# EAGLE board codeshield_complete (EAGLE 6.2)
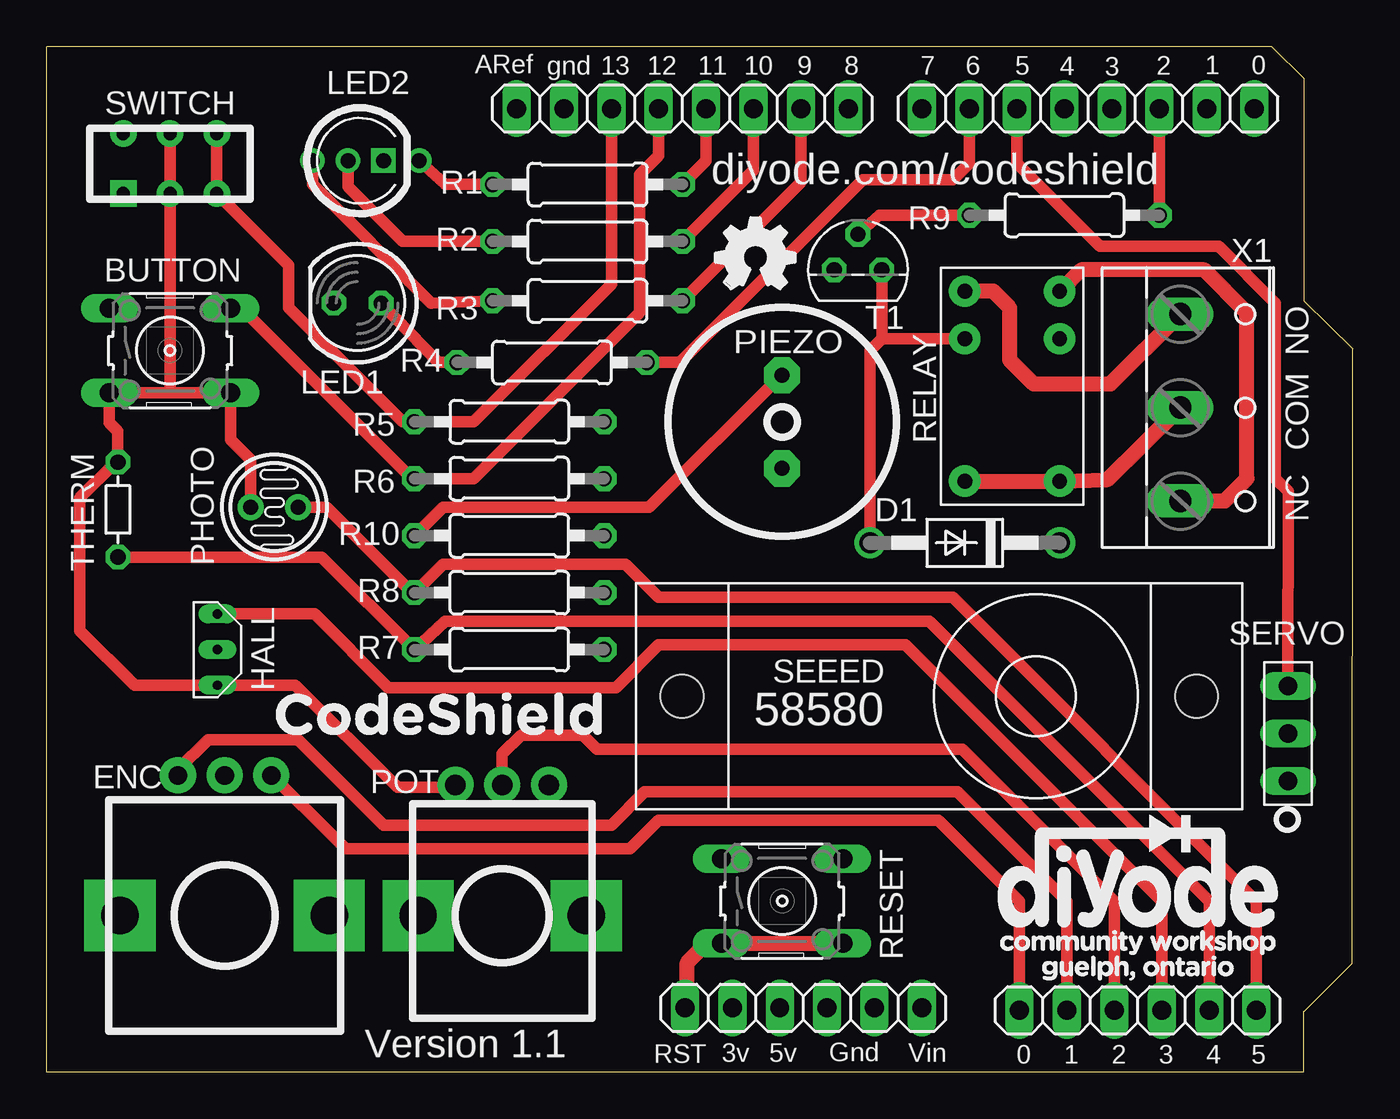
[diagram p0: board, top side]
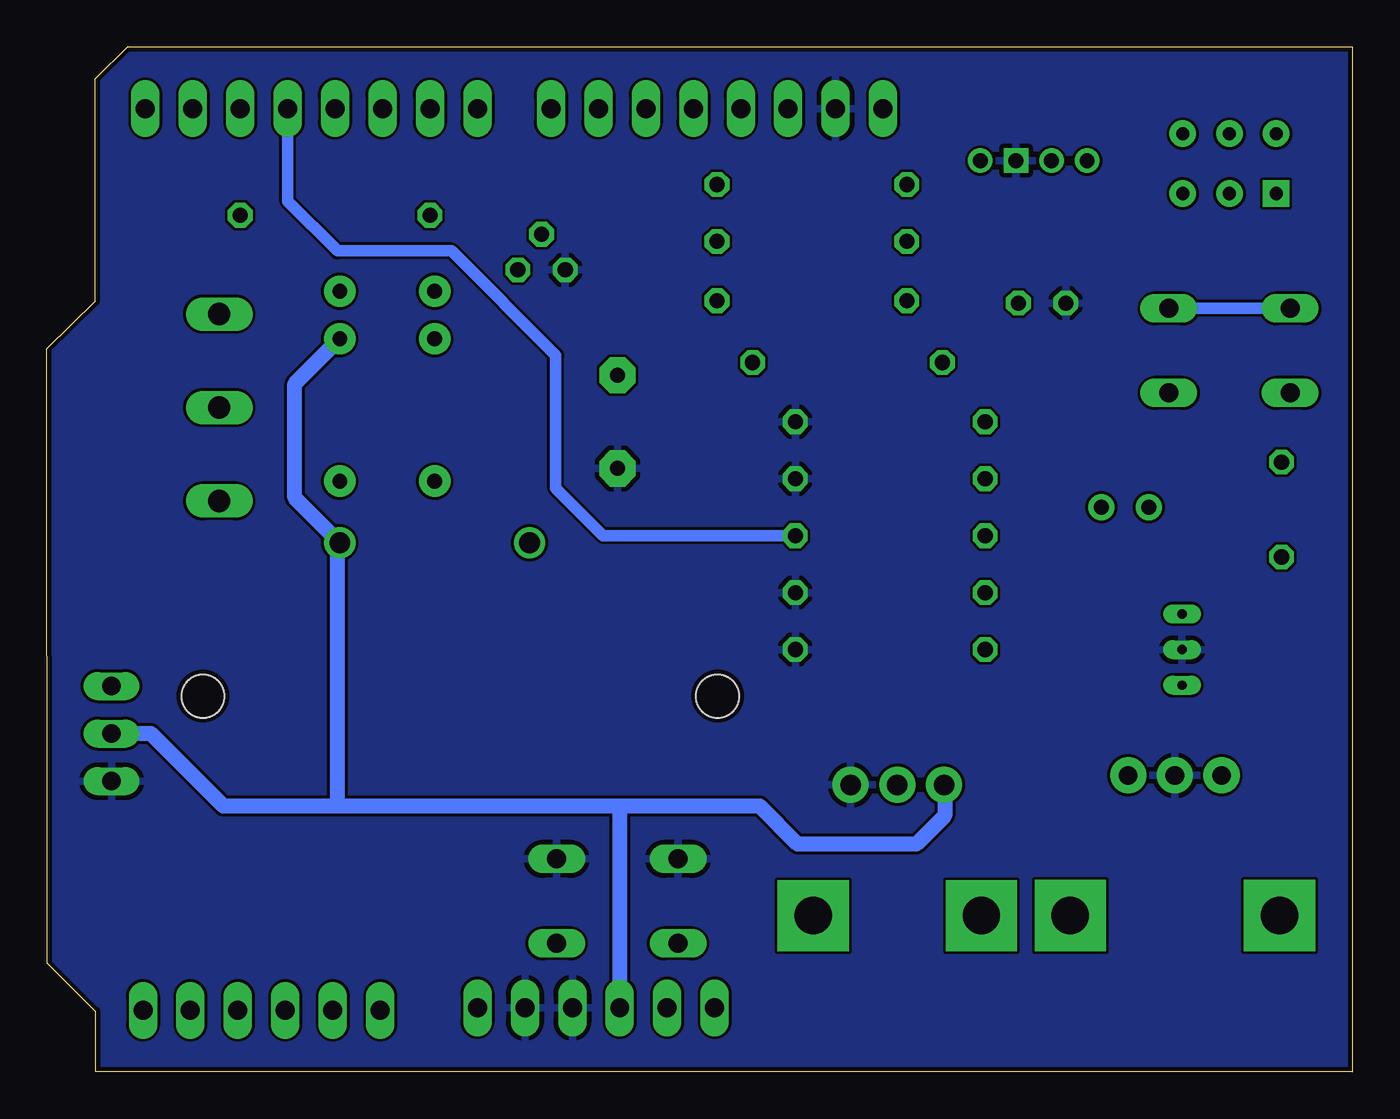
[diagram p1: board, bottom side, seen from below]

Size 69.92 x 54.87 mm. Coordinates in mm from the lower left corner, seen from the top.
Outline: 69.9,5.81 69.9,5.82
Outline: 69.9,5.82 69.92,38.71 67.32,41.25 67.32,53.16 65.59,54.87 0.01,54.87 0,0
Outline: 67.32,3.26 69.9,5.82
Outline: 0,0.01 67.31,0.01 67.31,3.26
Copper layers (1*16): Top 0.035mm / dielectric 1.5mm / Bottom 0.035mm
Design rules: minimum track width 6mil, minimum drill 12mil, track to track 6mil, track to pad 6mil, pad to pad 6mil, via to via 6mil, smd to smd 0mil, copper to edge 10mil, drill to drill 10mil, minimum pad ring 10mil, minimum via ring 6mil, stop-mask expansion 2mil, vias tented up to drill 100mil, thermal gap 10mil

## Footprints (pad centres in the part's own frame; a part is rotated, then mirrored left to right if it is on the bottom)
B3F-10XX = drill 1.016 long: 1 -3.251,2.261; 2 3.251,2.261; 3 -3.251,-2.261; 4 3.251,-2.261
DO41-10 = drill 1.118: A 5.08,0; C -5.08,0
12MM_ENCODER = drill 1 pad 1.93: A -2.5,0; B 2.5,0; COM 0,0 | drill 2 pad 3.81 square: P$4 5.6,7.5; P$5 -5.6,7.5
TO_92_SHORT = drill 0.5 long: OUT 1.905,0; V+ -1.905,0; V- 0,0
1X08 = drill 1.016 long: 1 -8.89,0; 2 -6.35,0; 3 -3.81,0; 4 -1.27,0; 5 1.27,0; 6 3.81,0; 7 6.35,0; 8 8.89,0
1X06 = drill 1.016 long: 1 -6.35,0; 2 -3.81,0; 3 -1.27,0; 4 1.27,0; 5 3.81,0; 6 6.35,0
LED5MM = drill 0.813 octagon: A -1.27,0; K 1.27,0
RGB_VERTICAL = drill 0.8: 1 3.81,0; 3 0,0; 4 -1.905,0 | drill 0.8 square: 2 1.905,0
TO46-VT200 = drill 0.8 pad 1.4: 1 -1.27,0; 2 1.27,0
PS1240P02BT = drill 0.8 pad 1.93 octagon: 1 -2.5,0; 2 2.5,0
VERT_POT = drill 1.1 pad 1.93: 1 -2.5,0; 2 0,0; 3 2.5,0 | drill 2 pad 3.81 square: P$4 -4.5,7; P$5 4.5,7
0207/10 = drill 0.813 octagon: 1 -5.08,0; 2 5.08,0
TSC_RELAY = drill 0.8 pad 1.676: 1 -5.08,2.54; 2 -2.54,2.54; 3 5.08,2.54; 4 5.08,-2.54; 5 -2.54,-2.54; 6 -5.08,-2.54
SG90_SERVO = drill 1 long: 1 -2.44,10.59; 2 -2.44,8.05; 3 -2.44,5.51 | hole 2.3: 2.45,6.05; 30,6.05
SLIDE_SWITCH = drill 0.7 pad 1.422 square: 1 -1.5,2.5 | drill 0.7 pad 1.422: 2 1.7,2.5; 3 -1.5,0; 4 1.7,0; 5 -1.5,-2.5; 6 1.7,-2.5
TO92 = drill 0.813 octagon: 1 1.27,0; 2 0,1.905; 3 -1.27,0
R-5 = drill 0.813 octagon: 1 -2.54,0; 2 2.54,0
W237-103 = drill 1.194 long: 1 -5,-1.29; 2 0,-1.29; 3 5,-1.29

## Placement (x,y rotation side)
BUTTON  [B3F-10XX]  6.6,38.61 0 top
D1  1N4004  [DO41-10]  49.15,28.33 180 top
ENC  EVE_ROTARY_ENCODER  [12MM_ENCODER]  9.53,15.88 180 top
HALL  SS49E  [TO_92_SHORT]  9.14,22.61 90 top
JP1  [1X08]  34.04,51.57 180 top
JP2  [1X08]  55.75,51.57 180 top
JP3  [1X06]  40.51,3.43 180 top
JP4  [1X06]  58.42,3.31 180 top
LED1  [LED5MM]  16.64,41.15 180 top
LED2  RGB LED  [RGB_VERTICAL]  16.13,48.77 0 top
PHOTO  CdS Photocell  [TO46-VT200]  12.19,30.23 0 top
PIEZO  PS1240P02BT  [PS1240P02BT]  39.37,34.8 270 top
POT  EVU_POTENTIOMETER  [VERT_POT]  24.38,15.37 180 top
R1  [0207/10]  28.96,47.5 0 top
R2  [0207/10]  28.96,44.46 0 top
R3  [0207/10]  28.96,41.28 0 top
R4  [0207/10]  27.05,37.98 0 top
R5  [0207/10]  24.77,34.8 180 top
R6  [0207/10]  24.77,31.76 180 top
R7  [0207/10]  24.77,22.61 0 top
R8  [0207/10]  24.77,25.66 0 top
R9  [0207/10]  54.48,45.85 180 top
R10  [0207/10]  24.77,28.71 0 top
RELAY  TSC_1FORMC  [TSC_RELAY]  51.69,36.71 270 top
RESET  [B3F-10XX]  39.37,9.15 0 top
SERVO  SG90_SERVO  [SG90_SERVO]  64.01,26.17 180 top
SWITCH  MHSS_MICROSLIDE  [SLIDE_SWITCH]  6.6,48.52 90 top
T1  2N3904  [TO92]  43.43,42.93 0 top
THERM  Thermistor  [R-5]  3.81,30.1 270 top
U$1  [OSHW_FILLX150_NOTEXT]  35.81,41.92 0 top
U$2  [DIYODE_LOGO]  50.8,4.83 0 top
U$3  [CODESHIELD_ONLY]  11.94,17.53 0 top
X1  [W237-103]  61.98,35.57 270 top

## Library data of the parts
BUTTON RESET = switch-omron
D1 = diode
ENC HALL POT RELAY SERVO SWITCH U$2 U$3 = CodeShield Parts
JP1-JP4 = pinhead
LED1 = led
LED2 = RGB LED
PHOTO = photo-elements
PIEZO = buzzer
R1-R10 = rcl
T1 = transistor
THERM = varistor
U$1 = ohw-logo
X1 = con-wago-500

## Nets
+3V3: JP3.5
+5V: BUTTON.3 BUTTON.4 D1.C HALL.V+ JP3.4 PHOTO.1 POT.3 RELAY.2 SERVO.2 SWITCH.3 SWITCH.4 THERM.1
BLUE: JP1.3 R2.2
BUTTON: BUTTON.1 BUTTON.2 JP1.5 R6.2
GND: ENC.COM HALL.V- JP1.7 JP3.2 JP3.3 LED1.K LED2.2 PIEZO.2 POT.1 R5.1 R6.1 R7.2 R8.2 RESET.1 RESET.2 SERVO.1 T1.3
GREEN: JP1.2 R3.2
HALL_SENSOR: HALL.OUT JP4.3
LED: JP2.7 R4.2
N$1: LED2.1 R1.1
N$2: LED2.3 R2.1
N$3: LED2.4 R3.1
N$4: PIEZO.1 R10.1
N$5: JP1.8
N$6: D1.A RELAY.5 T1.1
N$7: LED1.A R4.1
N$9: RELAY.1 X1.3
N$10: RELAY.3 RELAY.4 X1.2
N$12: RELAY.6 X1.1
N$13: R9.2 T1.2
PHOTOCELL: JP4.1 PHOTO.2 R8.1
PIEZO: JP2.4 R10.2
POTENTIOMETER: JP4.4 POT.2
RED: JP1.4 R1.2
RELAY: JP2.3 R9.1
RESET: JP3.6 RESET.3 RESET.4
ROTARY_A: ENC.A JP4.6
ROTARY_B: ENC.B JP4.5
SERVO: JP2.6 SERVO.3
SWITCH: JP1.6 R5.2 SWITCH.5 SWITCH.6
THERMISTOR: JP4.2 R7.1 THERM.2
UNUSED1: JP1.1
UNUSED2: JP2.8
UNUSED3: JP2.5
UNUSED4: JP2.2
UNUSED5: JP2.1
V+: JP3.1

## Tracks (layer width: path | path; a pad name or v marks a point on that pad's centre or on a via)
+5V
  Top 0.61: POT.3 21.76,15.25 18.8,15.25 13.31,20.71 HALL.V+ 4.7,20.71 1.78,23.63 1.78,30.74 3.68,32.64 THERM.1 3.81,34.3 3.35,34.75 BUTTON.3 6.63,36.35 | BUTTON.4 9.86,33.84 10.92,32.77 PHOTO.1 | BUTTON.4 9.12,36.35 | 6.63,36.35 BUTTON.4 | 6.63,36.35 6.6,36.38 SWITCH.3 SWITCH.4
  Bottom 0.61: 54.36,28.2 D1.C | POT.3 21.84,15.33
  Bottom 0.813: D1.C 56.64,30.74 56.64,36.84 RELAY.2 | 54.36,14.23 60.45,14.23 64.34,18.12 SERVO.2 | 54.36,14.23 54.36,28.2 | 21.84,15.33 21.84,13.72 23.37,12.2 29.72,12.2 31.75,14.23 39.37,14.23 | 39.37,14.23 54.36,14.23 | JP3.4 39.24,14.1 39.37,14.23
BLUE
  Top 0.61: R2.2 37.85,48.27 JP1.3
BUTTON
  Top 0.61: JP1.5 32.77,49.03 31.75,48.01 31.75,40.65 22.86,31.76 R6.2 19.3,32.01 10.44,40.87 BUTTON.2
  Bottom 0.61: BUTTON.1 BUTTON.2
GND
  pour Bottom: 0,54.87 69.98,54.87 69.98,0.01 0,0.01
GREEN
  Top 0.61: JP1.2 40.39,47.63 R3.2
HALL_SENSOR
  Top 0.61: JP4.3 59.69,9.15 45.97,22.87 32.77,22.87 30.48,20.58 18.29,20.58 14.35,24.52 HALL.OUT
LED
  Top 0.61: R4.2 33.91,37.98 43.69,47.76 48.51,47.76 49.4,48.65 JP2.7
N$1
  Top 0.61: LED2.1 21.34,47.5 R1.1
N$2
  Top 0.61: LED2.3 16.13,47.38 19.05,44.46 R2.1
N$3
  Top 0.61: LED2.4 14.22,47.5 20.57,41.15 R3.1
N$4
  Top 0.61: PIEZO.1 39.33,37.3 32.26,30.23 21.21,30.23 R10.1
N$6
  Top 0.61: 44.7,39.25 T1.1 | 44.7,39.25 44.07,38.61 D1.A | 44.7,39.25 RELAY.5
N$7
  Top 0.61: LED1.A 20.95,37.98 R4.1
N$9
  Top 0.813: RELAY.1 55.37,42.93 61.98,42.93 64.26,40.65 64.26,31.76 63.07,30.57 X1.3
N$10
  Top 0.813: RELAY.4 RELAY.3 56.79,31.7 X1.2
N$12
  Top 0.813: RELAY.6 50.67,41.79 51.56,40.9 51.56,38.11 52.83,36.84 56.96,36.84 X1.1
N$13
  Top 0.61: R9.2 44.58,45.85 T1.2
PHOTOCELL
  Top 0.61: JP4.1 64.77,9.15 48.51,25.41 32.77,25.41 30.99,27.18 21.21,27.18 R8.1 19.56,25.66 14.99,30.23 PHOTO.2
PIEZO
  Bottom 0.61: R10.2 40.13,28.71 42.67,31.25 42.67,38.36 48.26,43.95 54.36,43.95 57.02,46.61 JP2.4
POTENTIOMETER
  Top 0.61: POT.2 24.38,17.02 25.4,18.04 28.7,18.04 29.46,17.28 49.02,17.28 57.15,9.15 JP4.4
RED
  Top 0.61: R1.2 35.31,48.77 JP1.4
RELAY
  Top 0.61: R9.1 JP2.3
RESET
  Top 0.813: RESET.4 RESET.3 35.33,6.89 34.29,5.85 34.29,3.56 JP3.6
ROTARY_A
  Top 0.61: ENC.A 14.31,13.63 16,11.94 31.24,11.94 32.77,13.47 47.75,13.47 52.07,9.15 JP4.6
ROTARY_B
  Top 0.61: ENC.B 7.03,16.17 8.64,17.79 13.46,17.79 18.03,13.21 30.23,13.21 32,14.99 48.77,14.99 54.61,9.15 JP4.5
SERVO
  Top 0.61: JP2.6 51.94,48.65 56.39,44.2 62.74,44.2 65.79,41.15 65.79,31.76 66.47,31.07 SERVO.3
SWITCH
  Top 0.61: JP1.6 30.23,42.17 22.86,34.8 R5.2 19.05,34.8 12.95,40.9 12.95,43.17 SWITCH.5 SWITCH.6
THERMISTOR
  Top 0.61: JP4.2 62.23,9.15 47.24,24.14 21.34,24.14 R7.1 14.73,27.56 THERM.2

## Text on the board
tPlace: ARef | gnd | 13 | 12 | 11 | 10 | 9 | 8 | 7 | 6 | 5 | 4 | 3 | 2 | 1 | 0 | 3v | 5v | Gnd | Vin | RST | 0 | 1 | 2 | 3 | 4 | 5
tNames: diyode.com/codeshield | NO | COM | NC | SEEED | 58580 | Version 1.1
Reference: 2.65" | 2.16" | 2.75"